# Altium PCB SYN6288Pcb.PcbDoc
Units mil, origin at the board's own origin, x right, y up, seen from the top; angles counter-clockwise.
Board outline 2201.03 x 1568.03 mil, 2 copper layers (Top Layer, Bottom Layer); 26 components, 15 nets, 82 pads, 22 vias.
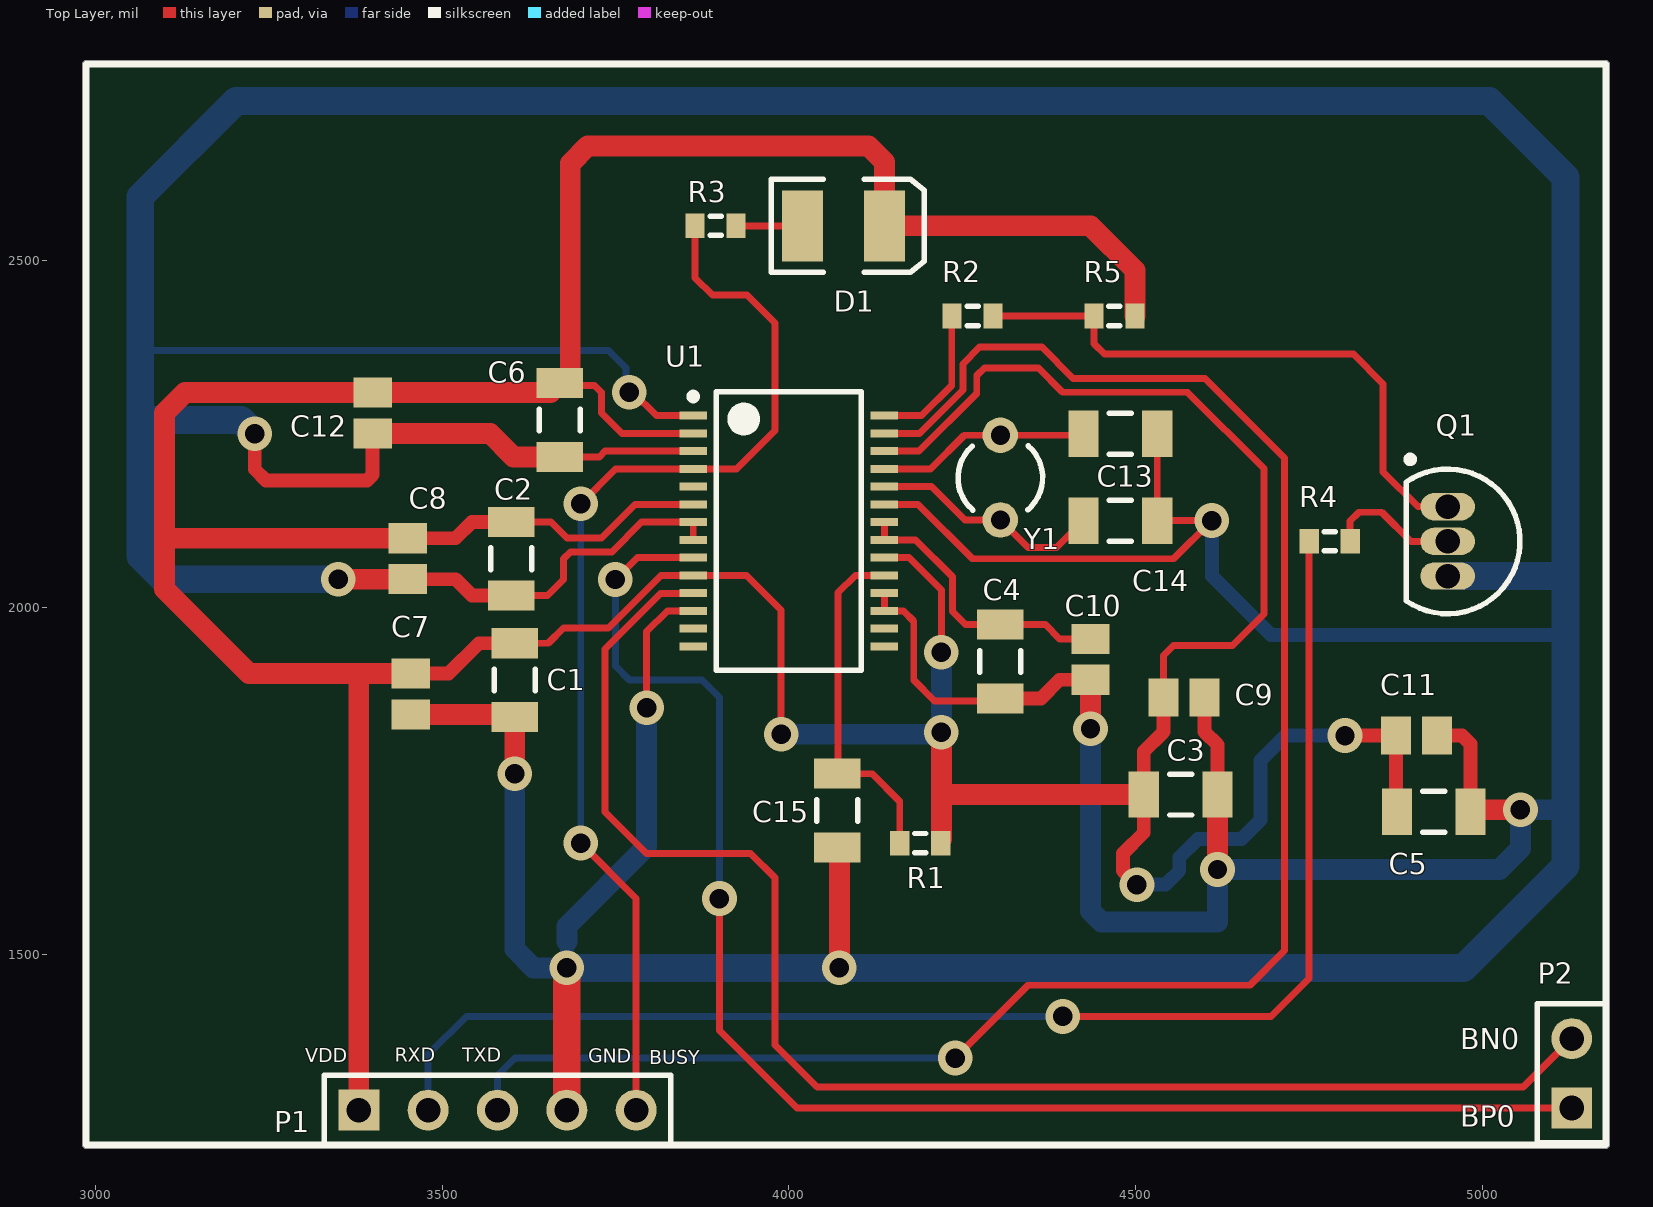
[diagram p0: Top Layer view]
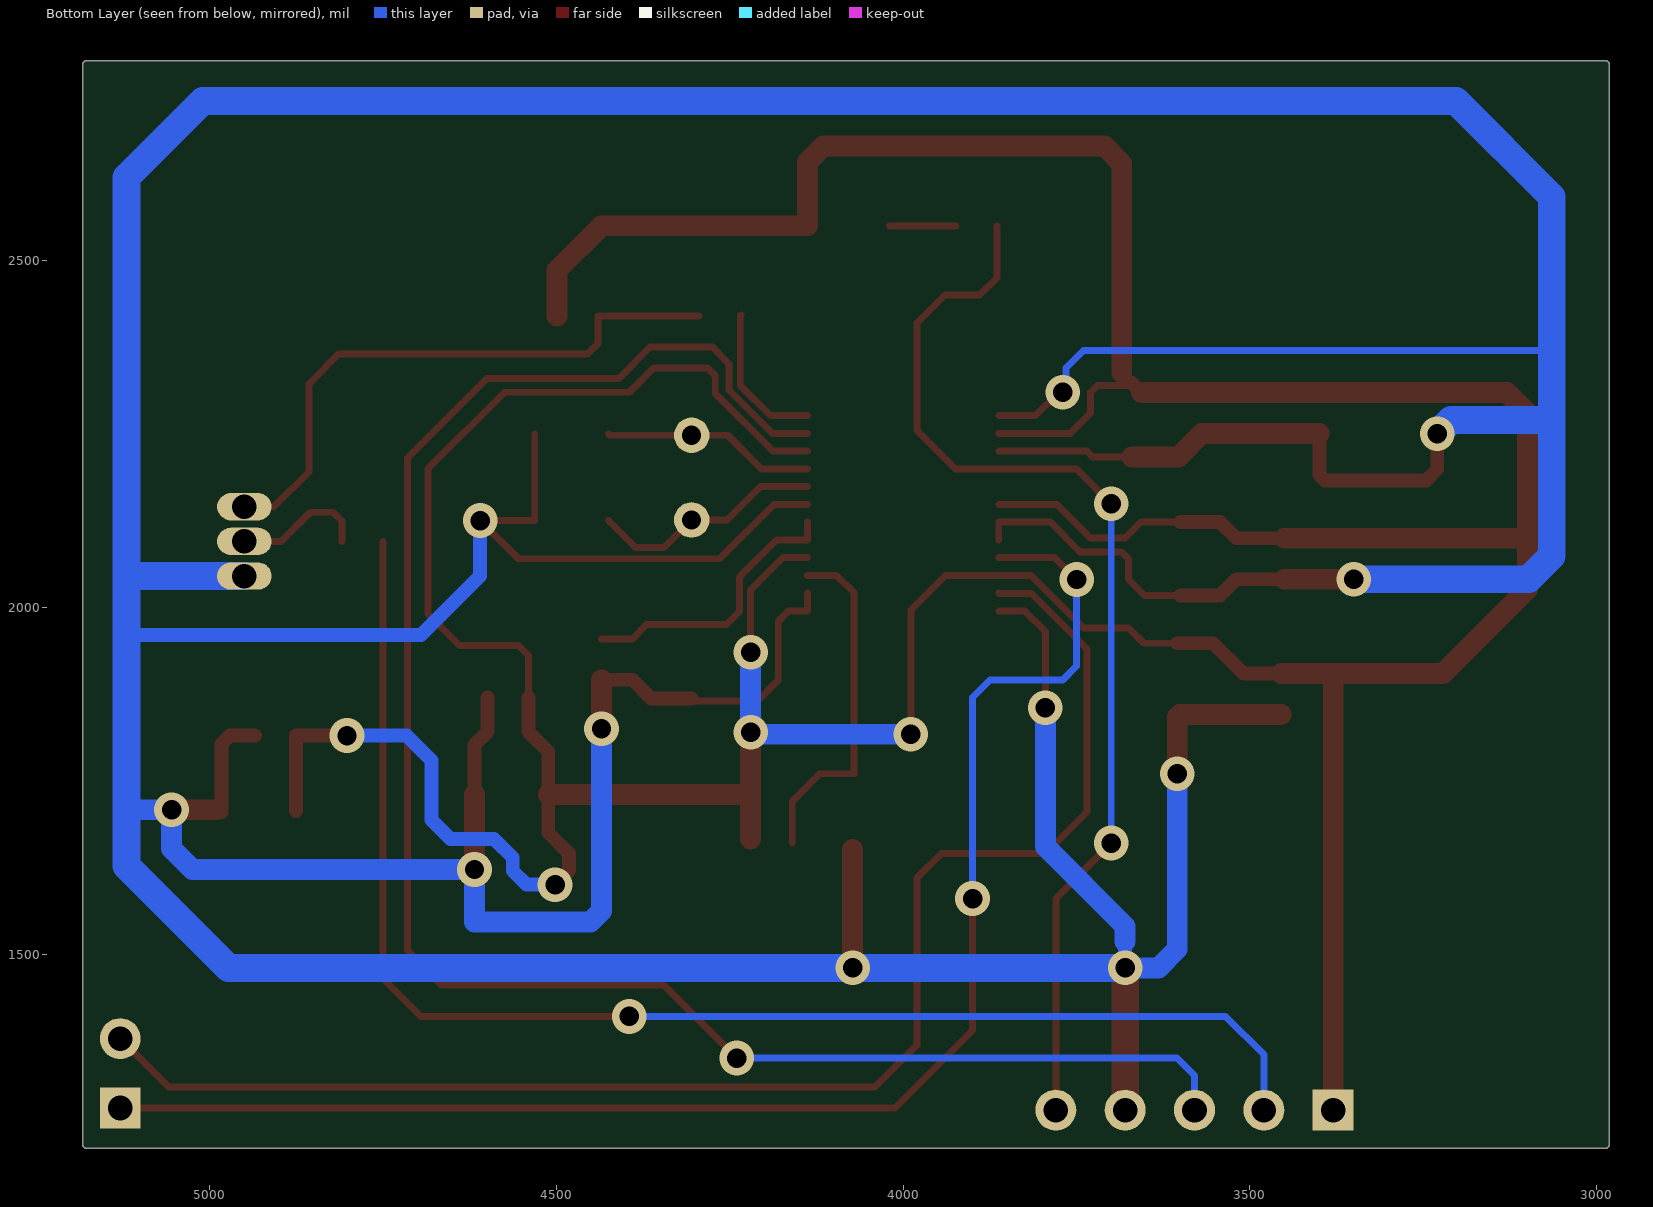
[diagram p1: Bottom Layer view, seen from below]

## Layer stack, top to bottom
Top Solder: solder mask 0.4, Solder Resist, Dk 3.5
Top Layer: signal copper 1.4
Dielectric 1: dielectric 12.6, FR-4, Dk 4.8
Bottom Layer: signal copper 1.4
Bottom Solder: solder mask 0.4, Solder Resist, Dk 3.5

## Board outline
2981.99,1225 ccw(c2987,1225) 2987,1219.98 5178,1219.98 ccw(c5178,1225) 5183.02,1225 5183.02,2783 ccw(c5178,2783) 5178,2788.01 2987,2788.01 ccw(c2987,2783) 2981.99,2783

## Design rules (kind name [scope] priority, off if disabled: settings)
AcuteAngle [All] p1: minimum=9.00000000000000E+0001 checktracksonly=FALSE
Clearance [All] p1: gap=6 ignorepadtopadclearanceinfootprint=TRUE
HoleSize [All] p1: absolutevalues=TRUE maxlimit=200 minlimit=1 maxpercent=80.000 minpercent=20.000
MinimumSolderMaskSliver [All] p1: minsoldermaskwidth=2
PolygonConnect [All] p1: connectstyle=Relief reliefconductorwidth=10 reliefentries=4 polygonreliefangle="90 Angle" airgapwidth=10
RoutingVias [All] p1: holewidth=28 width=50 viastyle="Through Hole" minholewidth=18 minwidth=30 maxholewidth=28 maxwidth=50
SilkToSolderMaskClearance [IsPad] p1: minsilkscreentomaskgap=3 clearancetoexposedcopper=TRUE
SolderMaskExpansion [All] p1: expansion=4
UnRoutedNet [All] p1: checkbadconnections=TRUE
Width [All] p1: maxlimit=100 minlimit=6 preferedwidth=10
26 further rules are at their usual default settings.

## Components (designator, comment, footprint, x,y, rotation, side; value= is the part's Value field where it differs from the comment)
C1 "Cap Semi" C1206 3605,1895 r90 top value=0.1u
C2 "Cap Semi" C1206 3600,2070 r90 top value=0.1u
C3 "Cap Semi" C1206 4565,1730 r180 top value=0.1u
C4 "Cap Semi" C1206 4305,1921.85 r90 top value=0.1u
C5 "Cap Semi" C1206 4930,1705 r180 top value=0.1u
C6 "Cap Semi" C1206 3670,2270 r90 top value=0.1u
C7 "Cap Pol3" C0805 3455,1875 r270 top value=47u
C8 "Cap Pol3" C0805 3450.47,2070 r270 top value=47u
C9 "Cap Pol3" C0805 4570,1870 r0 top value=47u
C10 "Cap Pol3" C0805 4435,1925 r270 top value=47u
C11 "Cap Pol3" C0805 4905,1815 r0 top value=47u
C12 "Cap Pol3" C0805 3400,2280 r270 top value=47u
C13 "Cap Semi" C1206 4478.15,2125 r0 top value=20pF
C14 "Cap Semi" C1206 4478.15,2250 r0 top value=20pF
C15 "Cap Semi" C1206 4070,1706.85 r90 top value=0.1u
D1 "LED3" 3.5X2.8X1.9 4079.06,2550 r0 top
P1 "Header 5" HDR1X5 3380,1275 r0 top
P2 "Header 2" HDR1X2 5129,1278 r90 top
Q1 "NPN" TO-226-AA 4950,2095 r180 top
R1 "Res3" J1-0603 4189.53,1660 r0 top value=1M
R2 "Res3" J1-0603 4265,2420 r0 top value=510
R3 "Res3" J1-0603 3894.53,2550 r0 top value=1K
R4 "Res3" J1-0603 4780,2095 r0 top value=1K
R5 "Res3" J1-0603 4469.53,2420 r0 top value=1K
U1 "SYN6288" SYN6288 4000,2110 r0 top
Y1 "16MHz" R38 4305,2187 r0 top

## Footprints (in the part's own frame and the unit in brackets; to place one, negate y for a bottom-side part, rotate by r counter-clockwise, add the part's x,y. Pads: shape width x height; smd on the part's side, far side on the other; paste and mask are expansions set on the pad)
3.5X2.8X1.9 [mm] "SM LED; 2 C-Bend Leads; Body 3.5 x 2.8 x 1.9 mm, inc leads (LxWxH typ)"
  rect 1.5x2.6 smd: 1(-1.5,0) 2(1.5,0)
  silkscreen extent -2.65,-1.7 2.95,1.7
C0805 [mm] "Chip Capacitor, Body 2.0x1.3mm, IPC High Density"
  rect 1.1x1.4 smd: 1(-0.75,0) 2(0.75,0)
  body extent -1.1,-0.72 1.1,0.72, height 1.4
C1206 [mm] "Chip Capacitor, Body 3.2x1.6mm, IPC High Density"
  rect 1.1x1.7 smd: 1(-1.35,0) 2(1.35,0)
  silkscreen extent -0.4,-0.75 0.4,0.75, body extent -1.7,-0.9 1.7,0.9, height 1.3
HDR1X2 [mm] "Connector; Header; 2 Position"
  rect 1.5x1.5 hole 0.9: 1(0,0)
  round 1.5 hole 0.9: 2(2.54,0)
  silkscreen extent -1.27,-1.27 3.81,1.27
HDR1X5 [mm] "Connector; Header; 5 Position"
  rect 1.5x1.5 hole 0.9: 1(0,0)
  round 1.5 hole 0.9: 2(2.54,0) 3(5.08,0) 4(7.62,0) 5(10.16,0)
  silkscreen extent -1.27,-1.27 11.43,1.27
J1-0603 [mm] "Chip Resistor, Body 1.6x0.8mm, IPC High Density"
  rect 0.7x0.9 smd: 1(-0.75,0) 2(0.75,0)
  silkscreen extent -0.2,-0.35 0.2,0.35, body extent -0.85,-0.48 0.85,0.48, height 0.9
R38 [mm] "Crystal, Thru-Hole; 2 Leads; Body 3.1 x 8.2 mm (Dia.xH)"
  round 1.3 hole 0.7: 1(0,1.55) 2(0,-1.55)
  silkscreen extent -1.55,-1.19 1.55,1.17
SYN6288 [mm] "SOP, 28-Leads, Body 10.15x5.20mm, Pitch 0.65mm, IPC Medium Density"
  rect 1x0.3 smd: 1(-3.5,4.225) 2(-3.5,3.575) 3(-3.5,2.925) 4(-3.5,2.275) 5(-3.5,1.625) 6(-3.5,0.975) 7(-3.5,0.325) 8(-3.5,-0.325) 9(-3.5,-0.975) 10(-3.5,-1.625) 11(-3.5,-2.275) 12(-3.5,-2.925) 13(-3.5,-3.575) 14(-3.5,-4.225) 15(3.5,-4.225) 16(3.5,-3.575) 17(3.5,-2.925) 18(3.5,-2.275) 19(3.5,-1.625) 20(3.5,-0.975) 21(3.5,-0.325) 22(3.5,0.325) 23(3.5,0.975) 24(3.5,1.625) 25(3.5,2.275) 26(3.5,2.925) 27(3.5,3.575) 28(3.5,4.225)
  silkscreen extent -3.62,-5.1 2.65,5.1, body extent -2.65,-5.1 2.65,5.1, height 1.9
TO-226-AA [mm] "TO, Flat Index; 3 In-Line, Axial Leads; Body Dia. 4.8mm; Leads 0.55 x 0.51 mm (max)"
  oval 2x1 hole 0.9: 1(0,-1.27) 2(0,0) 3(0,1.27)
  silkscreen extent -2.65,-3.13 1.52,2.65, body extent -2.65,-2.66 1.52,2.66, height 5.33

## Part data
C1 C2 C3 C4 C5 C6 C13 C14 C15: "Capacitor (Semiconductor SIM Model)", LatestRevisionDate=29-May-2009, LatestRevisionNote="IPC-7351 Footprint Added.", PackageDescription="Chip Capacitor", PackageReference=C1206, Published=8-Jun-2000, Publisher="Altium Limited"
C7 C8 C9 C10 C11 C12: "Polarized Capacitor (Surface Mount)", LatestRevisionDate=29-May-2009, LatestRevisionNote="IPC-7351 Footprint Added.", PackageDescription="Chip Capacitor", PackageReference=C0805, Published=8-Jun-2000, Publisher="Altium Limited"
D1: "Typical BLUE SiC LED", DatasheetVersion=16-Apr-2002, LatestRevisionDate=17-Dec-2003, LatestRevisionNote="PCB Footprint replaced.", PackageDescription="SM LED; 2 C-Bend Leads; Body 3.5 x 2.8 x 1.9 mm, inc leads (LxWxH typ)", PackageReference=3.5X2.8X1.9, PackageVersion=16-Apr-2002, Published=8-Jun-2000, Publisher="Altium Limited"
P1: "Header, 5-Pin", LatestRevisionDate=17-Jul-2002, LatestRevisionNote="Re-released for DXP Platform.", Publisher="Altium Limited"
P2: "Header, 2-Pin", LatestRevisionDate=17-Jul-2002, LatestRevisionNote="Re-released for DXP Platform.", Publisher="Altium Limited"
Q1: "NPN Bipolar Transistor", Code_JEDEC=TO-226-AA, LatestRevisionDate=17-Jul-2002, LatestRevisionNote="Re-released for DXP Platform.", PackageDescription="TO, Flat Index; 3 In-Line, Axial Leads; Body Dia. 4.8mm; Leads 0.55 x 0.51 mm (max)", PackageReference=TO-226-AA, Published=8-Jun-2000, Publisher="Altium Limited"
R1 R2 R3 R4 R5: "Resistor", LatestRevisionDate=29-May-2009, LatestRevisionNote="IPC-7351 Footprint Added.", PackageDescription="Chip Resistor", PackageReference=J1-0603, Published=8-Jun-2000, Publisher="Altium Limited"
Y1: library part XTAL, "Crystal Oscillator", LatestRevisionDate=17-Jul-2002, LatestRevisionNote="Re-released for DXP Platform.", PackageDescription="Crystal, Thru-Hole; 2 Leads; Body 3.1 x 8.2 mm (Dia.xH)", PackageReference=R38, Published=8-Jun-2000, Publisher="Altium Limited"

## Via types
v1: diameter 50, hole 28, Top Layer to Bottom Layer, 22 vias

## Nets (pads, with @x,y where several pads share a name; then routed paths per layer and width w, separated by ;. In a path a pad name is that pad's centre, name@x,y a point inside that pad or via, vN(x,y) a via of type N, cw(c..) or ccw(c..) an arc to the next point about the centre after c; other vN are vias at no path point)
BN0: P2.2 U1.11 | length 2124.1
  Top Layer w10: U1.11 3861.77,2020 3815,2020 3735,1940 3735,1705 3795,1645 3945,1645 3980,1610 3980,1369 4041,1308 5059,1308 P2.2
BP0: P2.1 U1.9 | length 2174.3
  Top Layer w10: v1(3750,2040) 3781.61,2071.61 U1.9 ; v1(3900,1580) 3900,1390 4012,1278 P2.1
  Bottom Layer w10: v1(3750,2040) 3750,1915 3770,1895 3875,1895 3900,1870 v1(3900,1580)
BUSY: P1.5 R3.1 U1.4 | length 1603
  Top Layer w10: v1(3700,1660) 3780,1580 P1.5 ; v1(3700,2149.13) 3750.43,2199.57 U1.4 3924.57,2199.57 3980,2255 3980,2410 3940,2450 3890,2450 3865,2475 R3.1
  Bottom Layer w10: v1(3700,1660) v1(3700,2149.13)
GND: C1.1 C2.1 C3.1 C4.1 C5.1 C6.1 C7.2 C8.2 C9.2 C10.2 C11.2 C12.2 C13.2 C14.2 C15.1 P1.4 Q1.3 U1.1 U1.3 U1.7 U1.8 U1.12 U1.17 U1.18 U1.23 | length 13085.6
  Top Layer w10: C2.1 3651.85,2016.85 3675,2040 3675,2070 3685,2080 3745,2080 3787.8,2122.8 U1.7 U1.8 ; C1.1@3601.38,1845.47 C1.1 ; C6.1 3726.85,2216.85 3735.16,2225.16 U1.3 ; v1@3770,2300 v1(3770,2310) 3775.34,2310 3809,2276.34 U1.1 ; v1(3795,1855) 3795,1965 3824.84,1994.84 U1.12 ; U1.18 U1.17 4165.16,1994.84 4180.16,1979.84 4180.16,1894.84 4210,1865 4301.3,1865 C4.1 ; U1.23 4186.61,2148.39 4265,2070 4555,2070 v1(4610,2125) C13.2 C14.2 ; C5.1 4985.15,1703 C5.1@4990.15,1708
  Top Layer w20: v1(3230,2250) 3230,2199 3246,2183 3392,2183 3400,2191 C12.2 ; C8.2 3519.53,2040.47 3543.15,2016.85 C2.1 ; C15.1 C15.1@4073,1650.7 ; C4.1 4363.7,1868.7 4390.47,1895.47 C10.2 ; C9.2 4599.53,1820.47 4618.15,1801.85 C3.1 ; C11.2 4971,1815 4983.15,1802.85 C5.1
  Top Layer w30: v1(3350.47,2040.47) C8.2 ; C12.2 3569.53,2250.47 3603.15,2216.85 C6.1 ; C7.2 C1.1@3601.38,1845.47 ; v1(3605,1760) C1.1 ; v1(4073,1480) C15.1@4073,1650.7 ; v1(4435,1825) C10.2 ; v1(4618.15,1621.85) C3.1 ; C5.1@4990.15,1708 v1(5055,1708)
  Top Layer w40: P1.4 v1(3680,1480)
  Bottom Layer w10: 3065,2372 3067,2370 3740,2370 3765,2345 3765,2315 v1(3770,2310) ; 3680,1518 3682,1520 ; 3740,1485 3745,1480 ; 4618.15,1481.85 4620,1480 ; 5118,1708 5120,1710
  Bottom Layer w20: v1(3680,1480) 3680,1518 ; v1@4070,1483 v1(4073,1480) ; v1(4610,2125) 4610,2045 4695,1960 5120,1960
  Bottom Layer w30: v1(3605,1760) 3605,1507 3632,1480 v1(3680,1480) ; 3680,1518 3680,1540 3795,1655 v1(3795,1855) ; v1(4435,1825) 4435,1562 4451,1546 4618.15,1546 v1(4618.15,1621.85) 5024.85,1621.85 5055,1652 v1(5055,1708) 5118,1708
  Bottom Layer w40: v1(3230,2250) 3210,2270 3067,2270 3065,2272 ; v1(3350.47,2040.47) 3098.53,2040.47 3065,2074 3065,2272 ; v1(3680,1480) 3745,1480 v1(4073,1480) 4435,1480 4620,1480 4973,1480 5120,1627 5120,1710 5120,1960 5120,2044 ; Q1.3 5119,2045 5120,2044 ; 3065,2272 3065,2372 3065,2592 3203,2730 5010,2730 5120,2620 5120,2044
NetC4_2: C4.2 C10.1 U1.21 U1.22 | length 411.2
  Top Layer w10: U1.22 U1.21 4182.8,2097.2 4236,2044 4236,1994 4255,1975 C4.2 4370,1975 4390.47,1954.53 C10.1
NetC13_1: C13.1 U1.24 Y1.2 | length 339.8
  Top Layer w10: U1.24 4206.02,2173.98 4254.02,2125.98 Y1.2 4344.98,2086 4386,2086 C13.1
NetC14_1: C14.1 U1.25 Y1.1 | length 308.1
  Top Layer w10: U1.25 4204.57,2199.57 4253.02,2248.02 Y1.1 4423.02,2248.02 C14.1
NetC15_2: C15.2 R1.1 U1.19 | length 505.1
  Top Layer w10: U1.19 4096.02,2046.02 4071.02,2021.02 4071.02,1761.02 C15.2 4120,1760 4160,1720 R1.1
NetD1_1: D1.1 R3.2 | length 95.9
  Top Layer w10: R3.2 D1.1
NetQ1_1: Q1.1 R2.2 R5.1 | length 867.2
  Top Layer w10: R2.2 R5.1 4440,2380 4455,2365 4814,2365 4857,2322 4857,2195 4907,2145 Q1.1
NetQ1_2: Q1.2 R4.2 | length 192.6
  Top Layer w10: R4.2 4809.53,2124.53 4822,2137 4855,2137 4897,2095 Q1.2
NetR2_1: R2.1 U1.28 | length 217
  Top Layer w10: U1.28 4191.34,2276.34 4235,2320 4235,2420.47 R2.1@4234.13,2421.34
RXD: P1.2 R4.1 | length 2025.6
  Top Layer w10: v1(4395,1410) 4695,1410 4750,1465 R4.1@4750,2095
  Bottom Layer w10: P1.2 3480,1355 3535,1410 v1(4395,1410)
TXD: P1.3 U1.27 | length 2706.5
  Top Layer w10: U1.27 4188.38,2250.75 4251,2313.37 4251,2351 4275,2375 4365,2375 4410,2330 4600,2330 4715,2215 4715,1505 4665,1455 4345,1455 v1(4240,1350) v1@4260,1350
  Bottom Layer w10: P1.3 3580,1325 3605,1350 v1(4240,1350)
VDD: C1.2 C2.2 C3.2 C5.2 C6.2 C7.1 C8.1 C9.1 C11.1 C12.1 D1.2 P1.1 R1.2 R5.2 U1.2 U1.6 U1.10 U1.20 U1.26 | length 8098.6
  Top Layer w10: C2.2 3656.85,2123.15 3680,2100 3730,2100 3778.39,2148.39 U1.6 ; C1.2 3653.15,1948.15 3675,1970 3740,1970 3816.02,2046.02 U1.10 3938.98,2046.02 3989,1996 v1(3989,1817) ; C6.2@3685,2338.15 C6.2 3673.15,2320 3720,2320 3730,2310 3730,2280 3759.25,2250.75 U1.2 ; U1.20 4173.39,2071.61 4220,2025 v1(4220,1935) ; U1.26 4187.78,2225.16 4271,2308.37 4271,2334 4282,2345 4360,2345 4395,2310 4575,2310 4685,2200 4685,1990 4640,1945 4555,1945 4540.47,1930.47 C9.1 ; R1.2 R1.2@4225,1665.94 ; C5.2@4875.47,1706.38 C5.2
  Top Layer w20: 3377,1904.53 3380,1901.53 ; C8.1 3519.53,2099.53 3543.15,2123.15 C2.2 ; C7.1 3509.53,1904.53 3553.15,1948.15 C1.2 ; C6.2@3656.38,2309.53 C6.2 ; v1(4502,1600) 4482,1620 4482,1645 4511.85,1674.85 C3.2 4511.85,1791.85 4540.47,1820.47 C9.1 ; v1(4802,1815) C11.1 C5.2@4875.47,1706.38
  Top Layer w30: P1.1 3380,1901.53 ; C8.1 3109.53,2099.53 3100,2090 ; C7.1 3377,1904.53 3221.77,1904.53 3100,2026.3 3100,2090 ; C6.2@3656.38,2309.53 C12.1 3129.53,2309.53 3100,2280 3100,2090 ; C6.2@3685,2338.15 3685,2640 3710,2665 4115,2665 4138.11,2641.89 D1.2 4435,2550 4499.06,2485.94 R5.2 ; R1.2@4220,1665.94 4220,1730 ; v1(4220,1820) 4220,1730 ; C3.2 4220,1730
  Bottom Layer w10: v1@4217,1817 v1(4220,1820)
  Bottom Layer w20: v1(4502,1600) 4543,1600 4563,1620 4563,1639 4590,1666 4653,1666 4680,1693 4680,1779 4716,1815 v1(4802,1815)
  Bottom Layer w30: v1(3989,1817) v1@4217,1817 ; v1(4220,1820) v1(4220,1935)
pads on no net: U1.5 U1.13 U1.14 U1.15 U1.16

## Silkscreen, mask and mechanical layers (free items; w line width, h text height)
Top Overlay:
  lines w10: 2987,1225 3330,1225 4030,1225 5178,1225 5178,2783 2988,2783 2987,2783 2987,1225
  text "BN0" at 4968,1363 h30
  text "RXD" at 3432,1345 h20
  text "TXD" at 3529,1345 h20
  text "VDD" at 3303,1344 h20
  text "GND" at 3711,1343 h20
  text "BUSY" at 3799,1341 h20
  text "BP0" at 4968,1251 h30

## Dimensions
2988,2783 to 2987,1225 on Top Overlay
2988,2783 to 5178,2783 on Top Overlay